# Altium PCB osc_evo.PcbDoc (part 1 of 5)
Units mm, origin at the board's own origin, x right, y up, seen from the top; angles counter-clockwise.
Board outline 145 x 85 mm, 4 copper layers (Top Layer, Mid-Layer 1, Mid-Layer 2, Bottom Layer); 114 components, 170 nets, 648 pads, 625 vias.
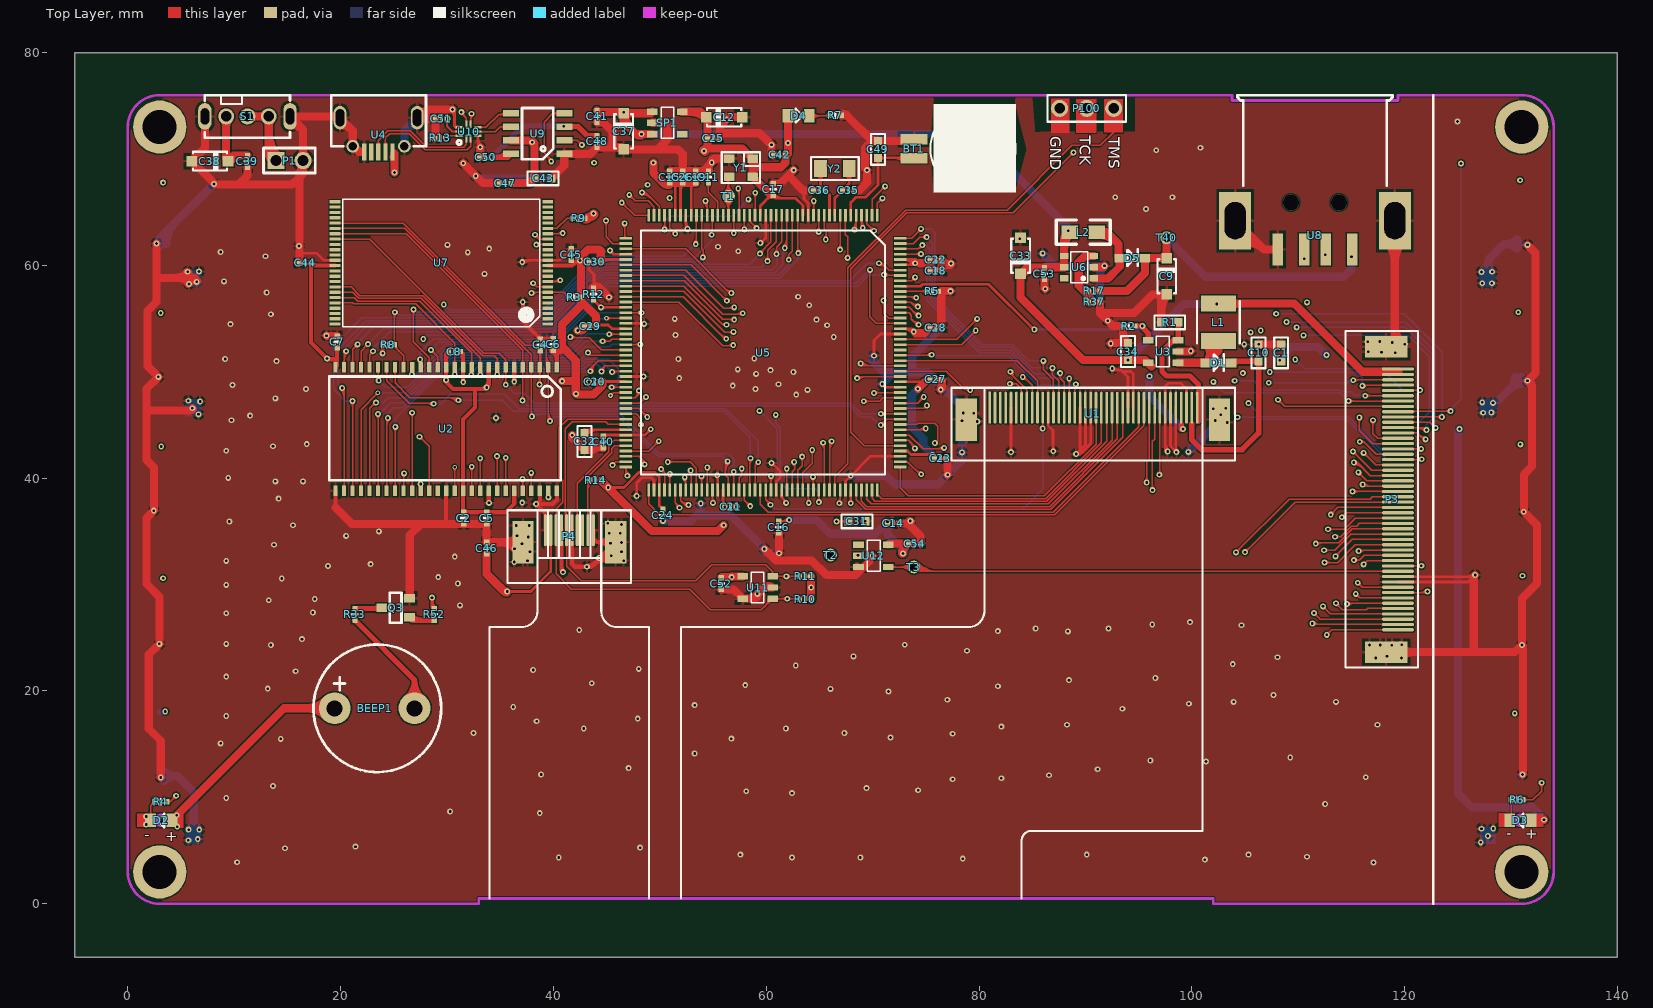
[diagram p0: Top Layer view]
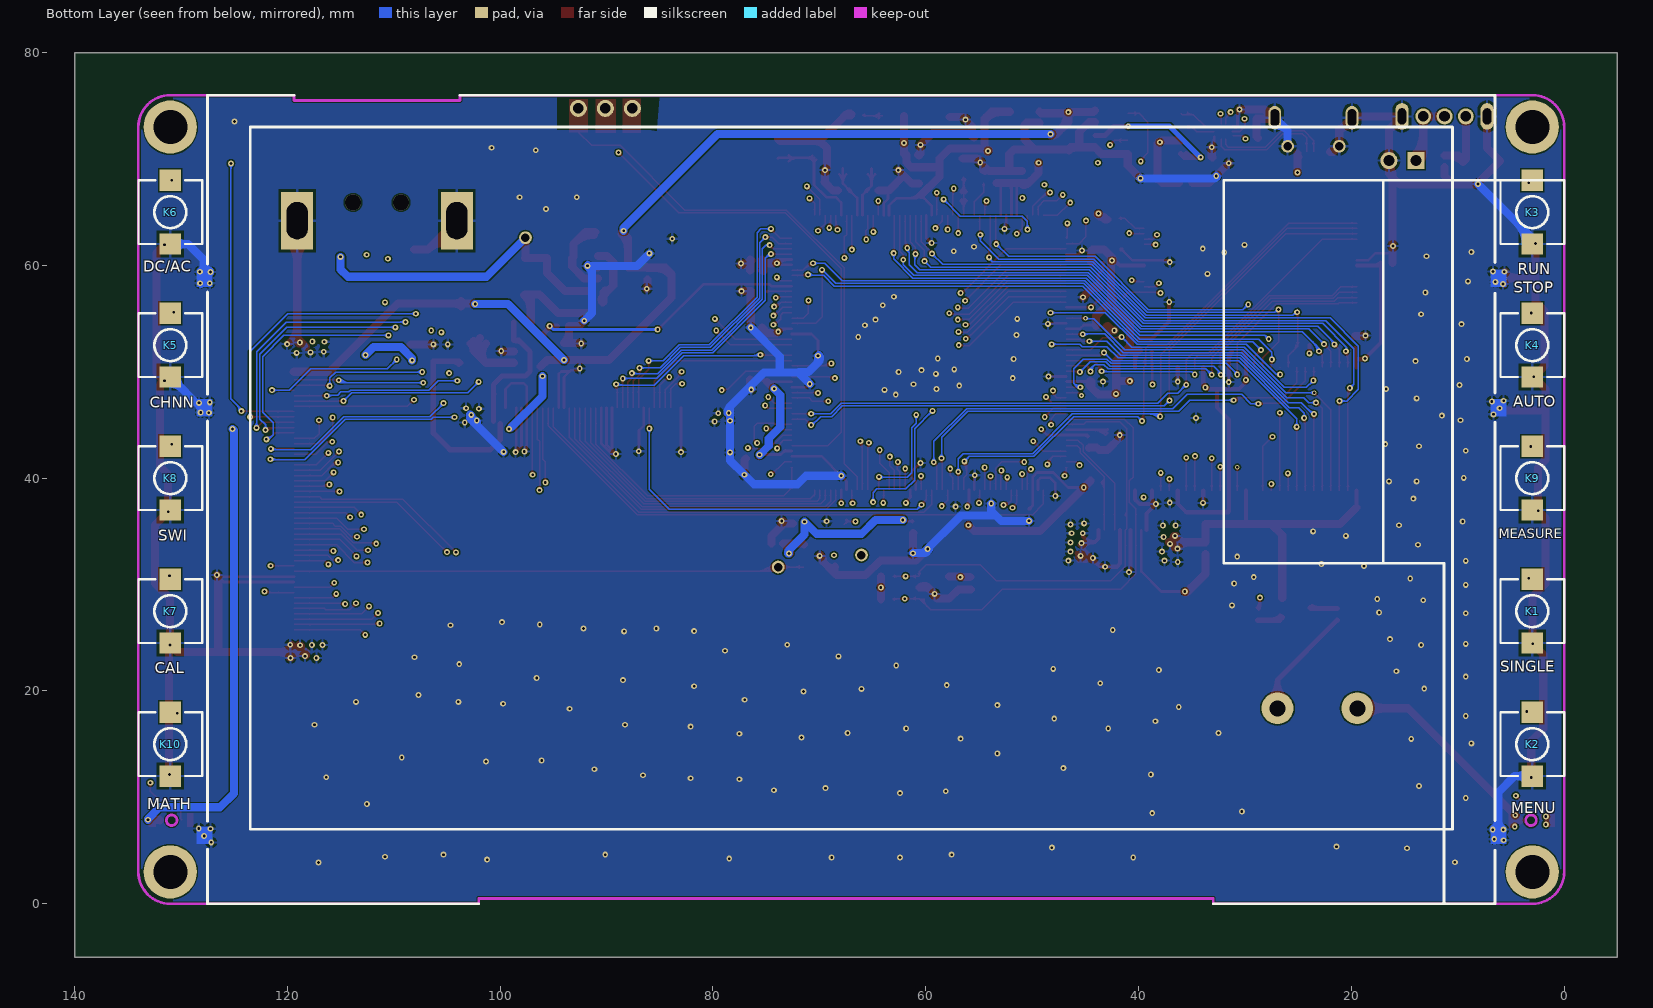
[diagram p1: Bottom Layer view, seen from below]
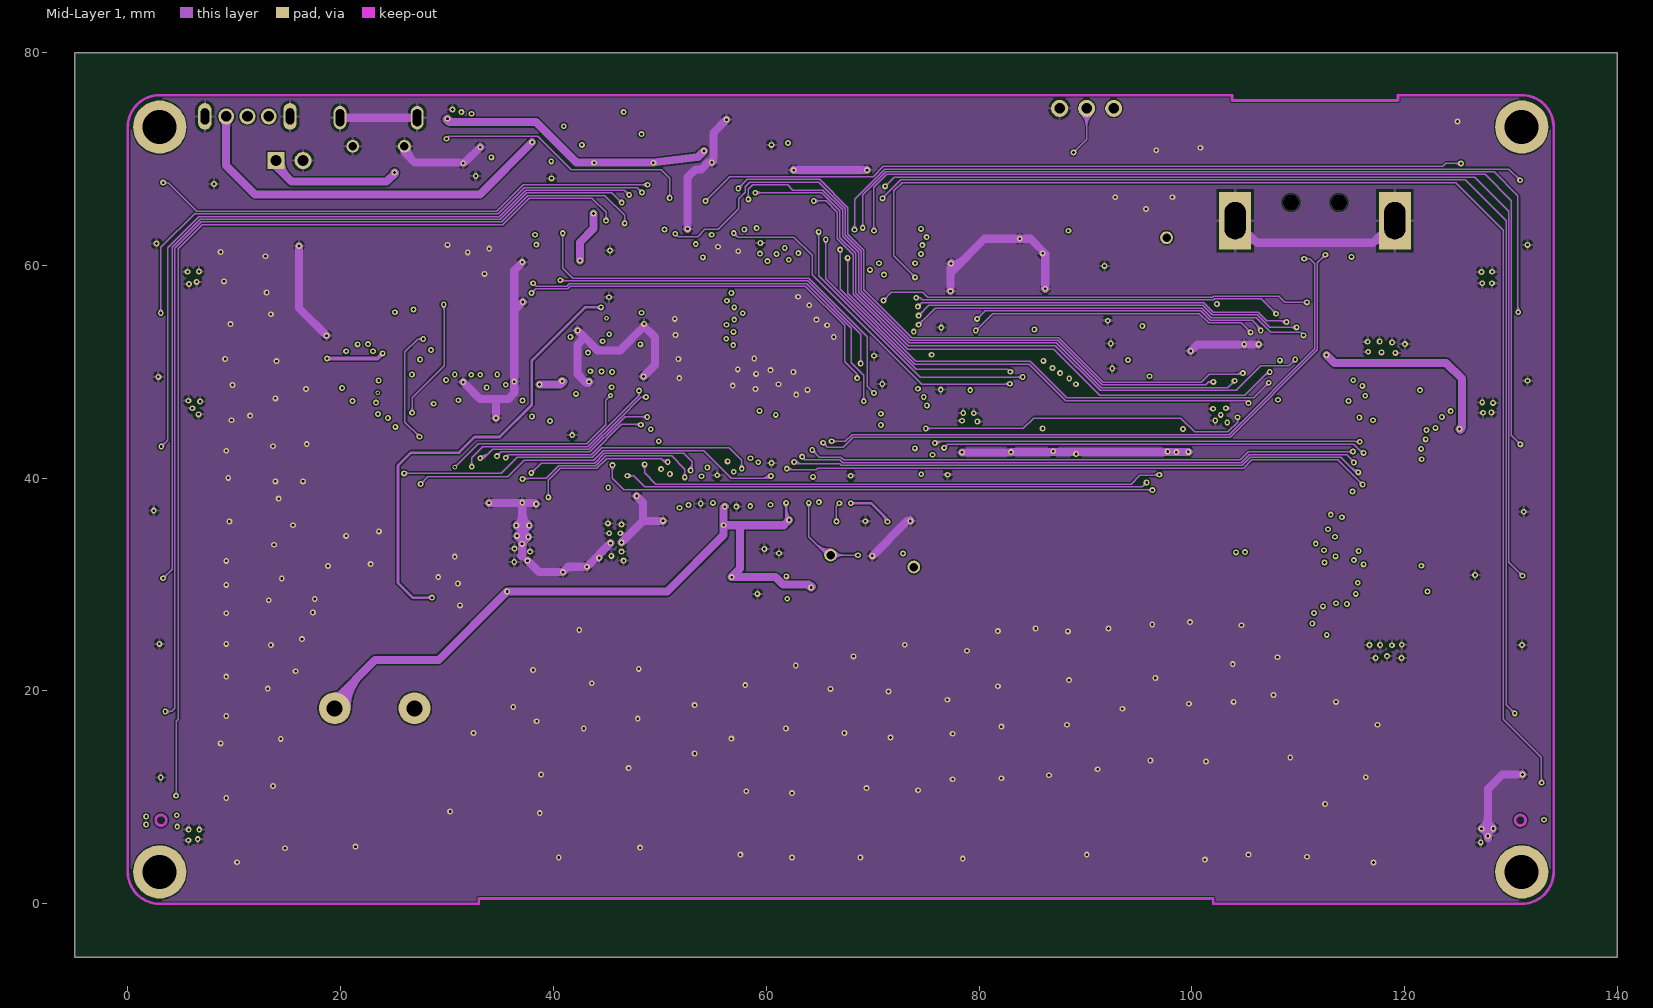
[diagram p2: Mid-Layer 1]
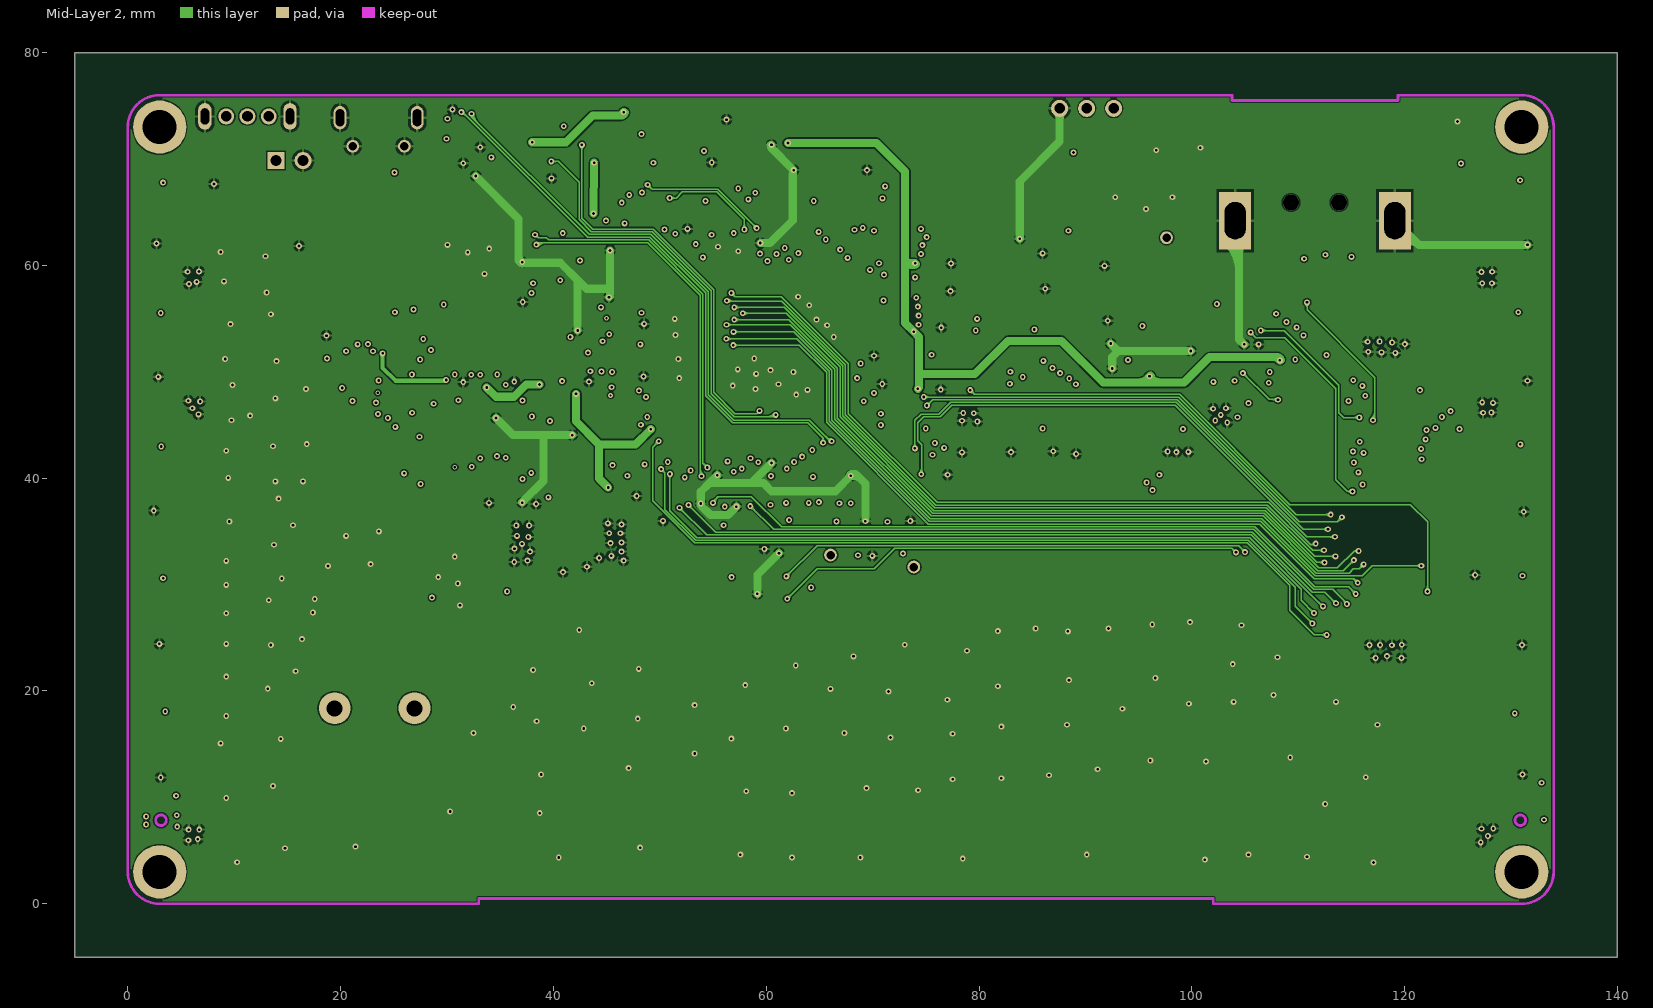
[diagram p3: Mid-Layer 2]

## Layer stack, top to bottom
Top Layer: signal copper 0.0356
Dielectric: core 0.32, FR-4, Dk 4.8
Mid-Layer 1: signal copper 0.0356
Dielectric: prepreg 0.32, FR-4, Dk 4.8
Mid-Layer 2: signal copper 0.0356
Dielectric: core 0.32, FR-4, Dk 4.8
Bottom Layer: signal copper 0.0356

## Board outline
-5,-5 140,-5 140,80 -5,80

## Design rules (kind name [scope] priority, off if disabled: settings)
Clearance [All] p1: gap=0.127
ComponentClearance [All] p1 off: gap=0.254 collisioncheckmode=3 verticalgap=0.254 showdistances=FALSE
Height [All] p1 off: minheight=0 maxheight=25.4 prefheight=12.7
HoleSize [All] p1: absolutevalues=TRUE maxlimit=6.3 minlimit=0.2 maxpercent=80.000 minpercent=20.000
HoleToHoleClearance [All] p1: gap=0.025 allowstackedmicrovias=TRUE
MinimumSolderMaskSliver [All] p1: minsoldermaskwidth=0.025
PolygonConnect [All] p1: connectstyle=Relief reliefconductorwidth=0.254 reliefentries=4 polygonreliefangle="90 Angle" airgapwidth=0.254
RoutingVias [All] p1: holewidth=0.2 width=0.45 viastyle="Through Hole" minholewidth=0.2 minwidth=0.45 maxholewidth=10 maxwidth=10
SilkToSilkClearance [All] p1 off: silktosilkclearance=0.025
SilkToSolderMaskClearance [IsPad] p1 off: minsilkscreentomaskgap=0.025 clearancetoexposedcopper=TRUE
SolderMaskExpansion [All] p1: expansion=0.102
Width [All] p1: maxlimit=5.08 minlimit=0.127 preferedwidth=0.127 minimp=50.000000 maximp=50.000000 favimp=50.000000
21 further rules are at their usual default settings.

## Classes and differential pairs
component class osc_evo: BT1 C1 C2 C4 C5 C6 C7 C8 C10 C11 C12 C14 C15 C16 C17 C18 C19 C20 C21 C22 C23 C24 C25 C26 C27 C28 C29 C30 C31 C32 C34 C35 C36 C37 C38 C39 C40 C41 C42 C49 D1 D2 D3 D4 L1 P1 P100 R1 R2 R4 R5 R6 R7 R8 R12 SP1 T1 U1 U2 U3 U5 Y1 Y2
component class osc_con: BEEP1 C9 C33 C43 C44 C45 C46 C47 C48 C50 C51 C52 C53 C54 D5 K1 K2 K3 K4 K5 K6 K7 K8 K9 K10 L2 P3 P4 Q3 R3 R9 R10 R11 R13 R14 R17 R33 R37 R52 S1 T2 T3 T40 U4 U6 U7 U8 U9 U10 U11 U12

## Components (designator, comment, footprint, x,y, rotation, side; value= is the part's Value field where it differs from the comment)
BEEP1 "BEEP12*9" BEEP 19.45,18.375 r0 top
BT1 "Battery" BAT1 76.1,71.625 r270 top
C1 "C10uF" 0603C 108.4,50.975 r90 top
C2 "C0.1uF" 0402 31.575,36.8 r270 top
C4 "C0.1uF" 0402 38.775,51.975 r90 top
C5 "C0.1uF" 0402 33.725,36.8 r270 top
C6 "C0.1uF" 0402 39.975,52.025 r90 top
C7 "C0.1uF" 0402 19.675,52.25 r90 top
C8 "C0.1uF" 0402 30.15,51.9 r0 top
C9 "47UF" CAP-T-3216 98.45,60.575 r270 top
C10 "C10uF" 0603C 106.275,50.975 r90 top
C11 "C1UF" 0402 54.575,67.75 r90 top
C12 "47uF" CAP-T-3216 54.45,74.725 r0 top
C14 "C0.1uF" 0402 71.4,35.75 r0 top
C15 "C0.1uF" 0402 50.95,67.75 r90 top
C16 "C0.1uF" 0402 61.175,35.95 r270 top
C17 "C0.1uF" 0402 60.65,66.6 r90 top
C18 "C0.1uF" 0402 75.4,59.5 r0 top
C19 "C0.1uF" 0402 53.367,67.75 r90 top
C20 "C0.1uF" 0402 44.45,49.075 r180 top
C21 "C0.1uF" 0402 56.1,37.325 r0 top
C22 "C0.1uF" 0402 75.4,60.525 r0 top
C23 "C0.1uF" 0402 75.825,41.85 r0 top
C24 "C0.1uF" 0402 50.3,37.075 r270 top
C25 "C0.1uF" 0402 54.475,71.925 r0 top
C26 "C0.1uF" 0402 52.158,67.75 r90 top
C27 "C0.1uF" 0402 75.4,49.275 r0 top
C28 "C0.1uF" 0402 75.4,54.15 r0 top
C29 "C0.1uF" 0402 44,54.3 r180 top
C30 "C0.1uF" 0402 44.45,60.325 r180 top
C31 "10uF" 0603C 67.725,35.95 r0 top
C32 "10uF" 0603C 42.925,44.25 r270 top
C33 "47UF" CAP-T-3216 83.1,59.3 r90 top
C34 "C10uF" 0603C 94,51.1 r90 top
C35 "C22pF" 0402 68.275,67.05 r180 top
C36 "C22pF" 0402 64.425,67.05 r0 top
C37 "47uF" CAP-T-3216 47.4,74.198 r270 top
C38 "47uF" CAP-T-3216 9.325,69 r180 top
C39 "C0.1uF" 0402 11.25,70.325 r270 top
C40 "C0.1uF" 0402 44.7,43.95 r270 top
C41 "C0.1uF" 0402 44.1,73.448 r90 top
C42 "C0.1uF" 0402 60.725,70.4 r0 top
C43 "22UF" 0603C 38.225,68.175 r0 top
C44 "C0.1uF" 0402 17.225,60.225 r180 top
C45 "C0.1uF" 0402 41.675,60.45 r90 top
C46 "C0.1uF" 0402 33.725,33.975 r270 top
C47 "104" 0402 36.025,67.725 r180 top
C48 "104" 0402 44.1,72.2 r270 top
C49 "C10uF" 0603C 70.5,70.1 r90 top
C50 "104" 0402 34.175,70.15 r180 top
C51 "C0.1uF" 0402 30.025,73.775 r180 top
C52 "C0.1uF" 0402 55.775,30.65 r270 top
C53 "104" 0402 86.15,59.775 r270 top
C54 "C0.1uF" 0402 73.4,33.85 r0 top
D1 "1N5819WS" SOD23-322F 101.325,50.85 r180 top
D2 "LED-B" LED 4.15,7.85 r180 top
D3 "LED-G" LED 131.875,7.85 r180 top
D4 "LED" LED 62.05,74.05 r0 top
D5 "1N5918WS" SOD23-322F 93.225,60.7 r180 top
K1 "KEY-PB" KEY_6*6*4.3 3,27.5 r180 bottom locked
K2 "KEY-PB" KEY_6*6*4.3 3,15 r180 bottom locked
K3 "KEY-PB" KEY_6*6*4.3 3,65 r180 bottom locked
K4 "KEY-PB" KEY_6*6*4.3 3,52.5 r180 bottom locked
K5 "KEY-PB" KEY_6*6*4.3 131,52.5 r180 bottom locked
K6 "KEY-PB" KEY_6*6*4.3 131,65 r180 bottom locked
K7 "KEY-PB" KEY_6*6*4.3 131,27.5 r180 bottom locked
K8 "KEY-PB" KEY_6*6*4.3 131,40 r180 bottom locked
K9 "KEY-PB" KEY_6*6*4.3 3,40 r180 bottom locked
K10 "KEY-PB" KEY_6*6*4.3 131,15 r180 bottom locked
L1 "Inductor-22uH" ins-443 100.5,52.65 r0 top
L2 "10uH" 0805 88.525,63.125 r0 top
P1 "Head2" HEAD2 16.475,69.85 r90 top
P3 "FPC50-0.5" FPC50-0.5 121,38 r180 top locked
P4 "TOUCH-PFC10" FPC10-0.5 41.5,34.55 r270 top
P100 "head*3" "head*3 - duplicate" 87.575,74.75 r90 top
Q3 "SI2302" SOT-23-3 26.475,26.925 r90 top
R1 "R8.2" 0603R 98.725,54.65 r180 top
R2 "R10K" 0402 93.525,54.3 r0 top
R3 "R10K" 0402 42.525,57.025 r180 top
R4 "R2K" 0402 2.55,9.6 r0 top
R5 "R10K" 0402 75.075,57.55 r0 top
R6 "R2K" 0402 130.025,9.775 r0 top
R7 "R2K" 0402 65.95,74.1 r0 top
R8 "R10K" 0402 25.05,52.525 r180 top
R9 "R10K" 0402 41.85,64.425 r0 top
R10 "R2K" 0402 63.125,28.625 r0 top
R11 "R2K" 0402 63.1,30.775 r0 top
R12 "R2K" 0402 43.775,57.85 r270 top
R13 "R10K" 0402 28.8,71.975 r0 top
R14 "R10K" 0402 44.525,39.8 r180 top
R17 "R84.5K" 0402 90.275,57.6 r0 top
R33 "R100R" 0402 21.35,27.75 r270 top
R37 "10K" 0402 91.375,56.575 r180 top
R52 "R100R" 0402 28.8,27.75 r270 top
S1 "SW" SW-3 7.25,74 r90 top
SP1 "SP6201-3-3" SOT23-5 49.3,74.436 r270 top
T1 "TP" TEST_POINT#1 56.45,66.5 r0 top
T2 "TP" TEST_POINT#2 66.05,32.775 r0 top
T3 "TP" TEST_POINT#2 73.875,31.65 r0 top
T40 "TP" TEST_POINT#2 97.625,62.6 r90 top
U1 "AT043TN24" FPC40-N 100.5,46.625 r270 top
U2 "W9825G6KH-6" TSOP54 40.325,50.425 r270 top locked
U3 "CAT4139" SOT23-5 98.7,50.85 r90 top
U4 "MINI USB" Micro_USB_t 26,71.2 r90 top
U5 "STM32F407IGT6" LQFP176 70.45,64.7 r270 top locked
U6 "SY7152ABC" SOT23-6 90.8,58.775 r90 top
U7 "MT29F4G08" TSOP48 39.475,54.475 r180 top locked
U8 "USB-A" USB-A-SMA 108.075,61.5 r270 top
U9 "HT42B534" SOP-8 41.025,70.475 r180 top (schematic designator U8)
U10 "BCT4227ETB" WQFN10 32.025,72.575 r90 top
U11 "K24C02" SOT23-5 60.6,28.675 r90 top
U12 "74LVC1G17" SOT23-5 68.675,33.75 r270 top
Y1 "XTAL-25Mhz" XTAL3225 59.125,70.325 r180 top
Y2 "Y32.768K-3216" CRY3215-2P 65.1,69.1 r0 top

## Footprints (in the part's own frame and the unit in brackets; to place one, negate y for a bottom-side part, rotate by r counter-clockwise, add the part's x,y. Pads: shape width x height; smd on the part's side, far side on the other; paste and mask are expansions set on the pad)
0402 [mm]
  rect 0.5x0.5 smd: 1(0,0) 2(1.1,0)
  silkscreen extent 0.55,-0.23 0.55,0.23
0603C [mil]
  rect 30x30 smd: 1(0,0) 2(62.99,0)
  silkscreen extent -26,-26 89,26
0603R [mil]
  rect 30x30 smd: 1(0,0) 2(62.99,0)
  silkscreen extent -26,-26 89,26
0805 [mil]
  rect 60x50 smd: 1(0,0) 2(100,0)
  silkscreen extent -50,-45 150,45
BAT1 [mm]
  rect 1x2.5 smd: 1(1.566,-2.211) 2(-0.234,-2.211)
  silkscreen extent -3.33,-0.66 4.67,7.34
BEEP [mm]
  round 3 hole 1.5: 1(0,0) 2(7.5,0)
  silkscreen extent -2,-6 10,6
CAP-T-3216 [mm]
  rect 1x1 smd: 1(-0.1,-0.8) 2(3.3,-0.8)
  silkscreen extent 0,-1.68 3.2,0.08
CRY3215-2P [mm]
  rect 1.2x1.6 smd: 1(0,0) 2(2.7,0)
  silkscreen extent -0.9,-1.07 3.6,1.1
FPC10-0.5 [mm]
  rect 4x2 smd: 0(0.56,4.35) 0(0.56,-4.35)
  oval 3x0.3 smd: 1(-0.56,-2.25) 2(-0.56,-1.75) 3(-0.56,-1.25) 4(-0.56,-0.75) 5(-0.56,-0.25) 6(-0.56,0.25) 7(-0.56,0.75) 8(-0.56,1.25) 9(-0.56,1.75) 10(-0.56,2.25)
  silkscreen extent -2.43,-5.8 4.39,5.8
FPC40-N [mm]
  rect 4x2 smd: 0(1.12,2.104) 0(1.12,-21.695)
  oval 3x0.25 smd: 1(0,0) 2(0,-0.5) 3(0,-1) 4(0,-1.5) 5(0,-2) 6(0,-2.5) 7(0,-3) 8(0,-3.5) 9(0,-4) 10(0,-4.5) 11(0,-5) 12(0,-5.5) 13(0,-6) 14(0,-6.5) 15(0,-7) 16(0,-7.5) 17(0,-8) 18(0,-8.5) 19(0,-9) 20(0,-9.5) 21(0,-10) 22(0,-10.5) 23(0,-11) 24(0,-11.5) 25(0,-12) 26(0,-12.5) 27(0,-13) 28(0,-13.5) 29(0,-14) 30(0,-14.5) 31(0,-15) 32(0,-15.5) 33(0,-16) 34(0,-16.5) 35(0,-17) 36(0,-17.5) 37(0,-18) 38(0,-18.5) 39(0,-19)
  rect 3x0.25 smd: 40(0,-19.5)
  silkscreen extent -1.88,-23.08 4.97,3.55
FPC50-0.5 [mm]
  rect 4x2 smd: 0(2.745,14.35) 0(2.745,-14.35)
  oval 3x0.3 smd: 1(1.625,12.25) 2(1.625,11.75) 3(1.625,11.25) 4(1.625,10.75) 5(1.625,10.25) 6(1.625,9.75) 7(1.625,9.25) 8(1.625,8.75) 9(1.625,8.25) 10(1.625,7.75) 11(1.625,7.25) 12(1.625,6.75) 13(1.625,6.25) 14(1.625,5.75) 15(1.625,5.25) 16(1.625,4.75) 17(1.625,4.25) 18(1.625,3.75) 19(1.625,3.25) 20(1.625,2.75) 21(1.625,2.25) 22(1.625,1.75) 23(1.625,1.25) 24(1.625,0.75) 25(1.625,0.25) 26(1.625,-0.25) 27(1.625,-0.75) 28(1.625,-1.25) 29(1.625,-1.75) 30(1.625,-2.25) 31(1.625,-2.75) 32(1.625,-3.25) 33(1.625,-3.75) 34(1.625,-4.25) 35(1.625,-4.75) 36(1.625,-5.25) 37(1.625,-5.75) 38(1.625,-6.25) 39(1.625,-6.75) 40(1.625,-7.25) 41(1.625,-7.75) 42(1.625,-8.25) 43(1.625,-8.75) 44(1.625,-9.25) 45(1.625,-9.75) 46(1.625,-10.25) 47(1.625,-10.75) 48(1.625,-11.25) 49(1.625,-11.75) 50(1.625,-12.25)
  silkscreen extent -0.25,-15.83 6.58,15.8
HEAD2 [mm]
  rect 1.6x1.6 hole 1: 1(0,2.54)
  round 1.6 hole 1: 2(0,0)
  silkscreen extent -1.17,-1.15 1.17,3.72
"head*3 - duplicate" [mm]
  round 1.6 hole 1: 1(0,0) 2(0,-2.54) 3(0,-5.08)
  silkscreen extent -1.25,-6.22 1.25,1.12
ins-443 [mm]
  rect 3.3x1.5 smd: 1(2,3.75) 2(2,0.25)
  silkscreen extent 0,0 4,4
KEY_6*6*4.3 [mm]
  rect 2x2 smd: 1(0,-3) 2(0,3)
  silkscreen extent -3,-3 3,3
LED [mil]
  rect 40x50 smd: 1(0,0) 2(78.74,0)
  silkscreen extent 29,-25 49,27
LQFP176 [mm]
  rect 1.2x0.25 smd: 1(0,0) 2(0,-0.5) 3(0,-1) 4(0,-1.5) 5(0,-2) 6(0,-2.5) 7(0,-3) 8(0,-3.5) 9(0,-4) 10(0,-4.5) 11(0,-5) 12(0,-5.5) 13(0,-6) 14(0,-6.5) 15(0,-7) 16(0,-7.5) 17(0,-8) 18(0,-8.5) 19(0,-9) 20(0,-9.5) 21(0,-10) 22(0,-10.5) 23(0,-11) 24(0,-11.5) 25(0,-12) 26(0,-12.5) 27(0,-13) 28(0,-13.5) 29(0,-14) 30(0,-14.5) 31(0,-15) 32(0,-15.5) 33(0,-16) 34(0,-16.5) 35(0,-17) 36(0,-17.5) 37(0,-18) 38(0,-18.5) 39(0,-19) 40(0,-19.5) 41(0,-20) 42(0,-20.5) 43(0,-21) 44(0,-21.5) 89(25.8,-21.5) 90(25.8,-21) 91(25.8,-20.5) 92(25.8,-20) 93(25.8,-19.5) 94(25.8,-19) 95(25.8,-18.5) 96(25.8,-18) 97(25.8,-17.5) 98(25.8,-17) 99(25.8,-16.5) 100(25.8,-16) 101(25.8,-15.5) 102(25.8,-15) 103(25.8,-14.5) 104(25.8,-14) 105(25.8,-13.5) 106(25.8,-13) 107(25.8,-12.5) 108(25.8,-12) 109(25.8,-11.5) 110(25.8,-11) 111(25.8,-10.5) 112(25.8,-10) 113(25.8,-9.5) 114(25.8,-9) 115(25.8,-8.5) 116(25.8,-8) 117(25.8,-7.5) 118(25.8,-7) 119(25.8,-6.5) 120(25.8,-6) 121(25.8,-5.5) 122(25.8,-5) 123(25.8,-4.5) 124(25.8,-4) 125(25.8,-3.5) 126(25.8,-3) 127(25.8,-2.5) 128(25.8,-2) 129(25.8,-1.5) 130(25.8,-1) 131(25.8,-0.5) 132(25.8,0)
  rect 0.25x1.2 smd: 45(2.15,-23.65) 46(2.65,-23.65) 47(3.15,-23.65) 48(3.65,-23.65) 49(4.15,-23.65) 50(4.65,-23.65) 51(5.15,-23.65) 52(5.65,-23.65) 53(6.15,-23.65) 54(6.65,-23.65) 55(7.15,-23.65) 56(7.65,-23.65) 57(8.15,-23.65) 58(8.65,-23.65) 59(9.15,-23.65) 60(9.65,-23.65) 61(10.15,-23.65) 62(10.65,-23.65) 63(11.15,-23.65) 64(11.65,-23.65) 65(12.15,-23.65) 66(12.65,-23.65) 67(13.15,-23.65) 68(13.65,-23.65) 69(14.15,-23.65) 70(14.65,-23.65) 71(15.15,-23.65) 72(15.65,-23.65) 73(16.15,-23.65) 74(16.65,-23.65) 75(17.15,-23.65) 76(17.65,-23.65) 77(18.15,-23.65) 78(18.65,-23.65) 79(19.15,-23.65) 80(19.65,-23.65) 81(20.15,-23.65) 82(20.65,-23.65) 83(21.15,-23.65) 84(21.65,-23.65) 85(22.15,-23.65) 86(22.65,-23.65) 87(23.15,-23.65) 88(23.65,-23.65) 133(23.65,2.15) 134(23.15,2.15) 135(22.65,2.15) 136(22.15,2.15) 137(21.65,2.15) 138(21.15,2.15) 139(20.65,2.15) 140(20.15,2.15) 141(19.65,2.15) 142(19.15,2.15) 143(18.65,2.15) 144(18.15,2.15) 145(17.65,2.15) 146(17.15,2.15) 147(16.65,2.15) 148(16.15,2.15) 149(15.65,2.15) 150(15.15,2.15) 151(14.65,2.15) 152(14.15,2.15) 153(13.65,2.15) 154(13.15,2.15) 155(12.65,2.15) 156(12.15,2.15) 157(11.65,2.15) 158(11.15,2.15) 159(10.65,2.15) 160(10.15,2.15) 161(9.65,2.15) 162(9.15,2.15) 163(8.65,2.15) 164(8.15,2.15) 165(7.65,2.15) 166(7.15,2.15) 167(6.65,2.15) 168(6.15,2.15) 169(5.65,2.15) 170(5.15,2.15) 171(4.65,2.15) 172(4.15,2.15) 173(3.65,2.15) 174(3.15,2.15) 175(2.65,2.15) 176(2.15,2.15)
  silkscreen extent 1.43,-22.21 24.36,0.71
Micro_USB_t [mm]
  round 1.2 hole 0.8: 0(-0.005,4.85) 0(-0.005,0)
  oval 2.2x1.2 hole 0.8 slot 1.6 at 0 deg: 0(2.675,6.05) 0(2.675,-1.2)
  rect 1.6x0.4 smd: 1(-0.525,1.125) 2(-0.525,1.787) 3(-0.525,2.45) 4(-0.525,3.112) 5(-0.525,3.775)
  silkscreen extent 0,-2.02 4.8,6.88
SOD23-322F [mm]
  rect 1x0.83 smd: 1(0,0.025) 2(-2.36,0.025)
  silkscreen extent -1.68,-0.8 -0.73,0.72, body extent -2.58,-0.67 0.22,0.68, height 0.75
SOP-8 [mm]
  rect 1.5x0.6 smd: 1(0,0) 2(0,-1.27) 3(0,-2.54) 4(0,-3.81) 5(5,-3.81) 6(5,-2.54) 7(5,-1.27) 8(5,0)
  silkscreen extent 1.05,-4.32 3.98,0.51
SOT23-5 [mm]
  rect 0.6x1 smd: 1(0,0) 2(1.05,0) 3(2.1,0) 4(2.1,2.8) 5(0,2.8)
  silkscreen extent -0.4,0.82 2.5,2.02
SOT23-6 [mm]
  rect 0.6x0.8 smd: 1(0,0) 2(1.05,0) 3(2.1,0) 4(2.1,2.8) 5(1.05,2.8) 6(0,2.8)
  silkscreen extent -0.4,0.6 2.5,2.2
SOT-23-3 [mm]
  rect 0.8x1 smd: 1(0,0) 2(1.8,0) 3(0.9,2.6)
  silkscreen extent -0.5,0.75 2.3,1.85
SW-3 [mm]
  oval 2.5x1.25 hole 0.8 slot 1.5 at 0 deg: 1(0,0) 5(0,-8)
  round 1.5 hole 1: 2(0,-2) 3(0,-4) 4(0,-6)
  silkscreen extent -2,-8 2,0
TEST_POINT#1 [mm]
  round 1.2 smd: 1(0,0)
TEST_POINT#2 [mm]
  round 1.2 hole 0.8: 1(0,0)
TSOP48 [mm]
  rect 1x0.3 smd: 1(0,0) 2(0,-0.5) 3(0,-1) 4(0,-1.5) 5(0,-2) 6(0,-2.5) 7(0,-3) 8(0,-3.5) 9(0,-4) 10(0,-4.5) 11(0,-5) 12(0,-5.5) 13(0,-6) 14(0,-6.5) 15(0,-7) 16(0,-7.5) 17(0,-8) 18(0,-8.5) 19(0,-9) 20(0,-9.5) 21(0,-10) 22(0,-10.5) 23(0,-11) 24(0,-11.5) 25(20,-11.5) 26(20,-11) 27(20,-10.5) 28(20,-10) 29(20,-9.5) 30(20,-9) 31(20,-8.5) 32(20,-8) 33(20,-7.5) 34(20,-7) 35(20,-6.5) 36(20,-6) 37(20,-5.5) 38(20,-5) 39(20,-4.5) 40(20,-4) 41(20,-3.5) 42(20,-3) 43(20,-2.5) 44(20,-2) 45(20,-1.5) 46(20,-1) 47(20,-0.5) 48(20,0)
  silkscreen extent 0.75,-11.75 19.25,0.25
TSOP54 [mm]
  rect 1x0.4 smd: 1(0,0) 2(0,-0.8) 3(0,-1.6) 4(0,-2.4) 5(0,-3.2) 6(0,-4) 7(0,-4.8) 8(0,-5.6) 9(0,-6.4) 10(0,-7.2) 11(0,-8) 12(0,-8.8) 13(0,-9.6) 14(0,-10.4) 15(0,-11.2) 16(0,-12) 17(0,-12.8) 18(0,-13.6) 19(0,-14.4) 20(0,-15.2) 21(0,-16) 22(0,-16.8) 23(0,-17.6) 24(0,-18.4) 25(0,-19.2) 26(0,-20) 27(0,-20.8) 28(11.6,-20.8) 29(11.6,-20) 30(11.6,-19.2) 31(11.6,-18.4) 32(11.6,-17.6) 33(11.6,-16.8) 34(11.6,-16) 35(11.6,-15.2) 36(11.6,-14.4) 37(11.6,-13.6) 38(11.6,-12.8) 39(11.6,-12) 40(11.6,-11.2) 41(11.6,-10.4) 42(11.6,-9.6) 43(11.6,-8.8) 44(11.6,-8) 45(11.6,-7.2) 46(11.6,-6.4) 47(11.6,-5.6) 48(11.6,-4.8) 49(11.6,-4) 50(11.6,-3.2) 51(11.6,-2.4) 52(11.6,-1.6) 53(11.6,-0.8) 54(11.6,0)
  silkscreen extent 0.87,-21.37 10.63,0.38
USB-A-SMA [mm]
  rect 5.4x3 hole 2 slot 3.5 at 0 deg: 0(-2.7,11) 0(-2.7,-4)
  rect 3x1 smd: 1(0,7) 2(0,4.5) 3(0,2.5) 4(0,0)
  silkscreen extent -14.5,-3.8 -6,10.8
WQFN10 [mm]
  rect 0.7x0.2 smd: 1(-0.675,0.2) 2(-0.675,-0.2) 6(0.675,-0.2) 7(0.675,0.2)
  rect 0.2x0.7 smd: 3(-0.4,-0.875) 4(0,-0.875) 5(0.4,-0.875) 8(0.4,0.875) 9(0,0.875) 10(-0.4,0.875)
  silkscreen extent -1.22,0.68 -0.82,1.07
XTAL3225 [mm]
  rect 1x0.8 smd: 1(0.4,0.3) 2(2.6,0.3) 3(2.6,2) 4(0.4,2)
  silkscreen extent -0.3,-0.3 3.3,2.6

## Part data
BEEP1: library part Bell, "Electrical Bell"
BT1: "Multicell Battery"
C1: library part C10uF-B
C9 C12 C33 C37 C38: library part C10uF, "贴片电容"
C10 C34: library part "Cap Pol1", "Polarized Capacitor (Radial)"
C11 C47 C48 C50 C53: library part C0.1uF
C31 C32: library part ELECTRO1, "Electrolytic Capacitor"
C43: library part C100uF
D1 D5: library part Diode
D2 D3: library part LED
L1 L2: library part Inductor-100uH
P3: library part "Header 25X2", "Header, 25-Pin, Dual row"
P4: library part "Header 10", "Header, 10-Pin"
Q3: library part MOSFET-N
R3 R9 R13 R14: library part R2K
R17 R37: library part R1M
S1: library part HEAD5
SP1: library part SP6201
Y1: library part XTAL-100Mhz
Y2: library part Y32.768K

## Free pads (board coordinates)
  round 5 hole 3.2: 0(3,3) 0(3,73) 0(131,3) 0(131,73)

## Via types
v1: diameter 0.55, hole 0.25, Top Layer to Bottom Layer, tented both sides, 463 vias
v2: diameter 0.55, hole 0.25, Top Layer to Bottom Layer, 156 vias
v3: diameter 0.45, hole 0.2, Top Layer to Bottom Layer, tented both sides, 4 vias
v4: diameter 1.5, hole 1.5, Top Layer to Bottom Layer, tented both sides, 2 vias

## Nets (pads, with @x,y where several pads share a name; then routed paths per layer and width w, separated by ;. In a path a pad name is that pad's centre, name@x,y a point inside that pad or via, vN(x,y) a via of type N, cw(c..) or ccw(c..) an arc to the next point about the centre after c; other vN are vias at no path point)
3V3: BEEP1.1 C1.1 C2.1 C4.1 C5.1 C6.1 C7.1 C8.1 C12.1 C14.1 C15.1 C16.1 C17.1 C18.1 C19.1 C20.1 C21.1 C22.1 C23.1 C24.1 C25.1 C26.1 C27.1 C28.1 C29.1 C30.1 C40.1 C42.2 C44.1 C45.1 C46.2 C51.1 C52.1 C54.1 D2.1 D3.1 D4.1 P4.2 R3.1 R8.2 R9.2 R10.2 R11.2 R14.1 SP1.5 U1.4 U2.1 U2.3 U2.9 U2.14 U2.27 U2.43 U2.49 U5.15 U5.23 U5.36 U5.38 U5.39 U5.49 U5.62 U5.72 U5.82 U5.91 U5.103 U5.114 U5.127 U5.136 U5.149 U5.159 U5.171 U5.172 U7.12 U7.37 U10.9 U11.4 U12.5 Y1.1 Y1.4 | length 603.2
  Top Layer w0.203: C51.1@29.92,73.67 cw(c29.727,73.477) 30,73.477 ccw(c29.752,73.477) C51.1@29.927,73.652 ; 30,73.236 cw(c30.589,73.236) C51.1@30.173,73.652 ; 30,73.356 cw(c30.444,73.356) C51.1@30.13,73.67 ; C51.1@30.025,73.775 30,73.75 30,73.075 30.5,72.575 U10.9@31.15,72.575
  Top Layer w0.254: 33.725,31.425 35.8,29.35 37.875,29.35 39.75,31.225 P4.2@39.75,35.11 ; 35.291,29.859 cw(c34.783,29.35) v1@35.502,29.35 ; v1@35.755,29.245 cw(c36.007,28.993) 36.007,29.35 cw(c36.007,29.707) v1@35.755,29.455 ; v1@38.595,48.905 ccw(c38.282,49.218) 38.725,49.218 ; U2.3@38.673,50.777 ccw(c38.428,51.022) 38.775,51.022 ; C4.1@38.688,51.888 cw(c38.478,51.678) 38.775,51.678 cw(c39.072,51.678) C4.1@38.862,51.888 ; v1(38.7,48.8) 38.725,48.825 U2.3@38.725,50.425 38.775,50.475 C4.1@38.775,51.975 ; 38.725,49.097 ccw(c38.997,49.097) v1@38.805,48.905 ; C29.1@44,54.3 44.1,54.4 45.15,54.4 45.5,54.05 U5.62@46.8,54.05 ; C29.1@44.087,54.213 cw(c44.538,53.762) 44.538,54.4 ; C30.1@44.357,60.418 cw(c44.677,60.098) C30.1@44.677,60.55 ; C20.1@44.45,49.075 44.454,49.079 U5.72@46.771,49.079 ; C30.1@44.45,60.325 44.675,60.55 U5.49@46.8,60.55 ; C20.1@44.537,48.988 cw(c44.757,48.768) 44.757,49.079 ; C20.1@44.537,49.162 ccw(c44.737,49.362) 44.737,49.079 ; C30.1@44.537,60.238 cw(c45.29,59.485) 45.29,60.55 ; C40.1@44.7,43.95 44.8,44.05 U5.82@46.8,44.05 48.6,44.05 v1(49.15,44.6) ; C40.1@44.787,43.863 cw(c45.238,43.412) 45.238,44.05 ; v1(45.15,39.125) 46.625,39.125 48.025,40.525 49.55,40.525 49.95,40.125 U5.91@49.95,38.9 49.95,37.425 C24.1@50.3,37.075 ; v1@45.255,39.02 cw(c45.507,38.768) 45.507,39.125 cw(c45.507,39.482) v1@45.255,39.23 ; v1@49.002,44.6 cw(c48.645,44.6) 48.897,44.347 cw(c49.15,44.095) v1@49.15,44.452 ; C24.1@50.177,37.075 ccw(c49.88,37.075) 50.09,37.285 ccw(c50.3,37.495) C24.1@50.3,37.198 ; U5.39@51.45,64.7 51.454,64.704 51.454,67.746 51.45,67.75 ; U5.38@51.95,64.7 51.95,67.542 C26.1@52.158,67.75 ; 51.95,66.95 cw(c52.958,66.95) C26.1@52.245,67.663 ; C26.1@51.95,67.563 cw(c52.345,67.563) C26.1@52.066,67.843 ; U5.36@52.95,64.7 52.95,67.333 C19.1@53.367,67.75 ; C19.1@53.244,67.75 cw(c52.947,67.75) 53.157,67.54 cw(c53.367,67.33) C19.1@53.367,67.627 ; 55.95,37.984 ccw(c56.759,37.984) C21.1@56.187,37.412 ; 55.95,38.044 ccw(c56.819,38.044) C21.1@56.205,37.43 ; U5.103@55.95,38.9 55.95,37.475 v1(56.1,37.325) C21.1@56.15,37.275 ; C21.1@55.986,37.42 ccw(c55.788,37.586) 56.012,37.715 ; U5.23@59.45,64.7 59.45,65.6 C17.1@60.45,66.6 ; 60.099,66.249 cw(c60.65,65.697) 60.65,66.477 cw(c60.65,66.18) 60.86,66.39 cw(c61.07,66.6) C17.1@60.773,66.6 ; C17.1@60.557,66.507 ccw(c61.058,67.008) 61.058,66.3 ; C17.1@60.65,66.6 60.95,66.3 62.775,66.3 63.45,65.625 U5.15@63.45,64.7 ; C17.1@60.737,66.687 ccw(c61.671,67.621) 61.671,66.3 ; C16.1@61.175,35.95 62.026,35.95 v1(62.153,36.077) ; C16.1@61.262,35.863 cw(c61.472,35.653) 61.472,35.95 cw(c61.472,36.247) C16.1@61.262,36.037 ; U5.114@61.448,38.425 ccw(c61.987,38.425) 61.606,38.044 ; U5.114@61.449,38.426 ccw(c61.564,38.314) 61.45,38.2 ; U5.114@61.45,38.9 61.45,38.2 ; 61.49,35.95 ccw(c61.49,36.74) v1@62.048,36.181 ; 61.552,38.098 cw(c61.128,37.675) v1@61.727,37.675 ; v1(61.875,37.675) 61.975,37.675 61.45,38.2 ; v1@67.845,37.755 ccw(c67.593,38.007) 67.95,38.007 ccw(c68.307,38.007) v1@68.055,37.755 ; v1(67.95,37.65) U5.127@67.95,38.9 ; U5.136@72.6,42.55 73.3,42.55 ; U5.149@72.6,49.05 74.9,49.05 ; U5.159@72.6,54.05 73.593,54.05 v1(73.871,53.771) ; U5.171@72.6,60.05 v1@74,60.05 ; U5.172@72.6,60.55 74.075,60.55 74.212,60.413 ; U5.172@72.798,60.55 cw(c72.798,58.998) v1@73.895,60.095 ; U5.159@72.841,54.05 cw(c72.841,52.741) v1@73.767,53.667 ; U5.136@73.074,42.551 cw(c73.186,42.436) 73.3,42.55 ; U5.136@73.075,42.552 cw(c73.075,42.014) 73.456,42.394 ; 73.281,60.05 ccw(c73.281,60.919) v1@73.895,60.305 ; 73.411,60.55 cw(c73.411,59.611) v1@74.075,60.275 ; 73.454,54.05 cw(c73.454,53.354) v1@73.946,53.846 ; v1@73.723,53.771 ccw(c73.366,53.771) 73.619,54.024 ccw(c73.871,54.277) v1@73.871,53.919 ; 75.125,49.275 74.9,49.05 ; 75.207,42.225 cw(c75.207,41.782) v1@75.52,42.095 ; 75.328,42.225 ccw(c75.328,42.497) v1@75.52,42.305 ; C27.1@75.361,49.158 ccw(c75.218,48.732) 74.9,49.05 ; C23.1@75.65,42.025 75.45,42.225 73.625,42.225 73.3,42.55 ; C23.1@75.702,41.85 ccw(c75.405,41.85) 75.615,42.06 ccw(c75.825,42.27) C23.1@75.825,41.973
  Top Layer w0.381: C44.1@17.267,60.267 ccw(c17.972,60.972) 17.972,59.975 ; v1@18.785,51.31 ccw(c19.11,51.635) 19.11,51.175 ; U7.37@19.475,59.975 17.475,59.975 C44.1@17.225,60.225 17.225,52.75 v1(18.725,51.25) 18.8,51.175 19.675,51.175 ; U2.27@19.518,50.732 ccw(c19.14,51.11) 19.675,51.11 ; U2.27@19.525,50.425 19.675,50.575 19.675,51.175 ; C7.1@19.675,52.25 19.675,51.175 ; v1(23.95,51.725) R8.2@23.95,52.525 ; 29.925,51.213 cw(c30.837,51.213) C8.1@30.192,51.858 ; v1@30.01,49.225 ccw(c30.696,49.225) 30.211,48.739 ; C8.1@30.15,51.9 29.925,51.675 U2.14@29.925,50.425 v1(29.925,49.225) 29.825,49.125 30.575,48.375 32.65,48.375 ; 31.525,37.064 ccw(c31.839,37.064) C2.1@31.617,36.842 ; 33.159,48.375 ccw(c33.159,49.091) 33.665,48.585 ccw(c33.038,49.212) 33.925,49.212 ; v1@33.809,48.525 cw(c34.134,48.525) 33.905,48.755 ; U2.9@33.925,50.425 33.925,48.775 33.525,48.375 32.65,48.375 ; U2.49@36.325,38.825 36.325,37.6 35.525,36.8 C5.1@33.725,36.8 C2.1@31.575,36.8 31.525,36.85 U2.43@31.525,38.825 31.525,45.525 32.65,46.65 32.65,48.375 ; U7.12@39.475,59.975 41.75,59.975 v1@42.225,60.45 ; C6.1@39.933,51.983 cw(c38.986,51.036) 40.325,51.036 ; C6.1@39.964,51.967 cw(c39.881,51.53) 40.325,51.53 ; C6.1@39.975,52.025 40.325,51.675 U2.1@40.325,50.425 ; 41.886,60.111 cw(c42.5,59.498) v1@42.5,60.366
  Top Layer w0.508: v1@99,44.597 99,45.025 ccw(c99.485,45.025) v1@99.188,44.642
  Top Layer w0.762: D2.1@4.15,7.85 14.675,18.375 BEEP1.1@19.45,18.375 ; BEEP1.1@18.659,17.584 ccw(c16.748,15.673) 16.748,18.375 ccw(c16.748,21.077) BEEP1.1@18.659,19.166 ; C46.2@33.725,32.875 33.725,31.425 33.725,31 35.375,29.35 v1(35.65,29.35) ; 35.362,29.363 ccw(c35.65,29.652) v1@35.65,29.244 ; C6.1@39.975,52.025 40.675,52.025 40.817,52.167 40.817,52.358 ; v1(40.825,49.125) 42.1,49.125 ; v1@42.1,47.975 42.1,49.125 ; v1@42.225,47.85 43.775,47.85 44.45,48.525 ; 43.225,64.55 43.45,64.55 ; 43.246,64.55 ccw(c43.246,65.404) v1@43.85,64.8 ; v1(43.775,64.875) 43.45,64.55 ; v1@43.873,64.835 cw(c43.45,65.007) 43.45,64.55 ; C29.1@44,54.3 44,55.225 42.592,56.633 ; 44.285,48.36 ccw(c43.569,49.075) C20.1@44.581,49.075 ; C20.1@44.45,49.075 44.45,48.525 ; C30.1@44.45,60.325 44.45,61.225 44.525,61.3 44.35,61.475 43.25,61.475 42.592,60.817 42.592,56.633 ; R14.1@44.525,39.8 44.525,39.75 v1(45.15,39.125) 49.25,35.025 55.45,35.025 v1(56,35.575) ; C20.1@44.571,49.124 cw(c44.059,48.916) 44.45,48.525 ; v1(49.4,69.65) 49.4,68.675 50.325,67.75 ; 50.107,67.968 ccw(c50.95,68.812) C15.1@50.95,67.619 ; C15.1@51.006,67.632 cw(c50.75,68.175) 50.325,67.75 ; SP1.5@52.1,74.436 53.838,74.436 C12.1@54.35,73.925 54.475,73.8 C25.1@54.475,71.925 54.475,71 ; 52.828,74.436 cw(c52.828,72.403) 54.266,73.841 cw(c53.761,73.336) 54.475,73.336 ; C19.1@53.367,67.75 C26.1@52.158,67.75 51.45,67.75 C15.1@50.95,67.75 50.325,67.75 ; v1@54.071,70.821 cw(c54.475,70.455) 54.475,71 ; v1@54.075,70.825 cw(c54.498,70.402) 54.498,71 ; v1(54.15,70.75) 54.475,71.075 ; v1@54.225,70.675 ccw(c53.621,71.279) 54.475,71.279 ; C52.1@55.825,30.7 v1(56.75,30.7) ; v1@56.75,30.775 U11.4@57.8,30.775 ; C17.1@60.45,66.6 Y1.4@58.725,68.325 58.725,69.225 ; C42.2@61.918,70.307 ccw(c61.598,70.627) C42.2@62.05,70.627 ; D4.1@62.05,74.05 v1(62.05,71.5) 62.05,70.625 C42.2@61.825,70.4 61.825,69.65 61.4,69.225 58.725,69.225 ; R11.2@64.2,30.775 64.225,30.75 v1(64.225,29.725) R10.2@64.225,28.625 ; U12.5@71.475,33.75 71.575,33.85 C54.1@73.4,33.85 72.854,33.304 v1(72.854,32.927) ; v1@72.748,32.927 cw(c73.402,32.927) 72.939,33.389 ; v1@74.025,53.622 74.872,53.622 C28.1@75.4,54.15 ; v1(74.25,48.4) 74.9,49.05 ; 74.425,60.2 75.075,60.2 C22.1@75.4,60.525 75.4,59.875 ; 74.932,60.2 ccw(c74.932,60.993) C22.1@75.493,60.432 ; C18.1@75.27,59.48 cw(c75.725,59.55) 75.4,59.875 ; C18.1@75.4,59.5 75.35,59.55 75.35,59.825 75.4,59.875 ; D3.1@131.982,7.85 132.032,7.9 v1(133.1,7.9) ; 40.817,52.358 40.817,54.442 42.592,56.217 42.592,56.633 ; 40.817,52.358 42.1,51.075 42.1,49.125 ; 54.475,71 57.75,71 Y1.1@58.725,70.025 58.725,69.225 ; R3.1@42.394,57.025 ccw(c42.862,57.025) 42.531,56.694 cw(c42.862,57.025) R3.1@42.394,57.025 ; v1@42.394,60.45 cw(c42.802,60.45) 42.513,60.738 ccw(c42.802,60.45) v1@42.394,60.45 ; R9.2@42.95,64.294 ccw(c42.95,64.883) 43.367,64.467 cw(c42.95,64.883) R9.2@42.95,64.294
  Mid-Layer 1 w0.254: v1@61.77,37.57 cw(c61.518,37.318) 61.875,37.318 cw(c62.232,37.318) v1@61.98,37.57 ; 61.875,36.175 v1(61.875,37.675) ; 61.875,36.492 ccw(c62.568,36.492) v1@62.078,36.002 ; 61.875,37.105 ccw(c63.182,37.105) v1@62.258,36.181 ; v1(67.95,37.65) 69.85,37.65 71.402,36.098 v1(71.403,35.902) v1(71.403,35.902) ; v1@68.055,37.545 cw(c68.307,37.293) 68.307,37.65 cw(c68.307,38.007) v1@68.055,37.755 ; 71.013,36.487 cw(c70.428,35.902) v1@71.255,35.902
  Mid-Layer 1 w0.381: v1(18.725,51.25) 23.475,51.25 v1(23.95,51.725)
  Mid-Layer 1 w0.762: BEEP1.1@19.45,18.375 19.45,19.125 23.25,22.925 29.225,22.925 v1(35.65,29.35) 50.7,29.35 56,34.65 v1(56,35.575) ; BEEP1.1@19.45,19.494 ccw(c19.45,20.385) 20.08,19.755 ; BEEP1.1@19.807,18.375 cw(c22.48,18.375) 20.59,20.265 ; BEEP1.1@20.569,18.375 cw(c25.081,18.375) 21.891,21.566 ; v1@29.953,73.733 ccw(c30.358,73.909) 30.358,73.467 ; v1@29.975,73.7 ccw(c30.538,74.263) 30.538,73.467 ; v1(30.05,73.775) 30.358,73.467 ; v1(38.7,48.8) 40.5,48.8 ; 40.296,48.8 ccw(c40.296,49.654) v1@40.9,49.05 ; v1(40.825,49.125) 40.5,48.8 ; v1@40.923,49.085 cw(c40.5,49.257) 40.5,48.8 ; v1(42.5,60.45) 42.5,62.175 43.775,63.45 v1(43.775,64.875) ; v1(54.15,70.75) 53.575,70.175 v1(49.4,69.65) v1(43.825,69.65) 42.175,69.65 38.358,73.467 30.358,73.467 ; v1(56.1,37.325) 56,37.225 v1(56,35.575) ; v1(62.153,36.077) 61.651,35.575 57.55,35.575 ; 63.836,29.992 cw(c63.836,29.336) v1@64.3,29.8 ; v1(64.225,29.725) 63.958,29.992 61.576,29.992 60.868,30.7 v1(56.75,30.7) 57.55,31.5 57.55,35.575 ; v1(112.65,51.575) 113.4,50.825 123.9,50.825 125.375,49.35 125.375,44.85 v1(125.15,44.625) ; v1@125.225,44.55 ccw(c124.863,44.912) 125.375,44.912 ; v1(56,35.575) 57.55,35.575
  Mid-Layer 2 w0.381: v1(23.95,51.725) 23.95,50.375 25.168,49.157 29.857,49.157 v1(29.925,49.225) ; 29.558,49.157 ccw(c29.558,49.592) v1@29.865,49.285
  Mid-Layer 2 w0.762: v1(33.725,48.525) 34.6,47.65 36.3,47.65 37.45,48.8 v1(38.7,48.8) ; v1(42.125,47.925) 42.125,45.35 44.3,43.175 ; v1(43.775,64.875) v1(43.825,69.65) ; v1(45.15,39.125) 44.3,39.975 44.3,43.175 ; v1(49.15,44.6) 47.725,43.175 44.3,43.175 ; v1(62.05,71.5) 70.375,71.5 73.05,68.825 73.05,60.5 ; 73.071,60.479 ccw(c74,61.407) v1@74,60.094 ; v1(74,60.2) 73.35,60.2 ; v1@74.053,60.108 cw(c73.761,60.611) 73.35,60.2 ; v1(74.25,48.4) 74.375,48.525 74.375,49.775 ; 94.832,48.975 ccw(c94.832,50.768) v1@96.1,49.5 ; v1@95.95,49.5 ccw(c97.218,50.768) 97.218,48.975 ; v1(96.025,49.575) 96.025,49.025 ; v1@96.119,49.623 cw(c95.661,49.389) 96.025,49.025 ; v1@96.126,49.608 cw(c95.536,49.414) 95.975,48.975 ; 107.807,51.375 cw(c107.807,50.607) v1@108.35,51.15 ; v1(108.275,51.075) 107.975,51.375 ; v1@108.372,51.118 ccw(c107.975,50.94) 107.975,51.375 ; 73.05,60.5 73.05,54.593 v1(73.871,53.771) 74.375,53.268 74.375,49.775 ; 73.05,60.5 73.35,60.2 ; 74.375,49.775 79.6,49.775 82.725,52.9 87.75,52.9 91.675,48.975 95.975,48.975 ; 95.975,48.975 99.275,48.975 101.675,51.375 107.975,51.375 ; 95.975,48.975 96.025,49.025
  Bottom Layer w0.762: v1(62.153,36.077) 64.723,36.077 66.025,34.775 70.277,34.775 v1(71.403,35.902) 71.403,34.697 72.9,33.2 72.9,32.973 v1(72.854,32.927) ; 72.808,33.292 cw(c72.443,32.927) v1@72.96,32.927 ; v1(74.25,48.4) 73.675,47.825 73.675,44.825 74.758,43.742 74.758,43.042 75.6,42.2 v1(75.625,42.2) ; v1(96.025,49.575) 96.025,47.7 v1@98.98,44.745 ; v1(108.275,51.075) 108.275,51.275 109.325,52.325 111.9,52.325 v1(112.65,51.575) ; v1(125.15,44.625) 125.025,44.5 125.025,10.375 126.325,9.075 132,9.075 133.1,7.975 v1(133.1,7.9)
  other v1: 4.65,7.25 4.6,8.325 99.175,44.625
5V: C33.1 C34.1 C37.1 C38.1 C39.1 C41.2 C43.1 C47.1 C53.1 L1.1 L2.1 P3.49 P3.50 S1.2 SP1.1 SP1.3 U3.5 U6.4 U6.5 U9.7 | length 186.3
  Top Layer w0.762: S1.2@8.989,73.739 cw(c8.359,73.109) 9.25,73.109 cw(c10.141,73.109) S1.2@9.511,73.739 ; 9.25,70.51 ccw(c10.135,70.51) C38.1@9.509,69.884 ; S1.2@9.25,74 9.25,69.975 C38.1@9.425,69.8 9.95,70.325 C39.1@11.25,70.325 ; C38.1@9.509,69.716 cw(c10.98,68.245) 10.98,70.325 ; U9.7@36.025,71.745 37.83,71.745 v1(38,71.575) 38.225,71.35 C43.1@38.225,68.175 ; C47.1@36.225,67.725 37.775,67.725 C43.1@38.225,68.175 ; 37.139,67.725 ccw(c37.139,69.261) C43.1@38.225,68.175 ; C41.2@44.1,74.548 44.248,74.4 v1(46.6,74.4) ; 46.067,74.4 cw(c46.067,73.766) C37.1@46.516,74.214 ; C37.1@46.719,74.298 ccw(c48.994,74.298) 47.385,72.69 ; 47.54,72.535 ccw(c48.275,73.27) v1@48.275,72.23 ; v1@48.322,72.242 cw(c48.096,72.694) 47.739,72.336 ; SP1.3@49.3,72.336 v1(48.275,72.336) 47.739,72.336 ; SP1.1@49.3,74.436 49.162,74.298 C37.1@46.6,74.298 46.6,73.475 47.739,72.336 ; C33.1@83.984,59.116 cw(c85.575,57.525) 85.575,59.775 ; 88,61.551 cw(c89.972,61.551) L2.1@88.578,62.945 ; L2.1@88.525,63.125 88,62.6 U6.4@88,60.875 U6.5@88,59.825 86.2,59.825 C53.1@86.15,59.775 84.475,59.775 C33.1@83.9,59.2 83.9,56.975 89.775,51.1 v1(94,51.1) 95.625,51.1 96.225,50.5 ; 95.292,51.1 cw(c95.292,50.442) U3.5@95.757,50.907 ; L1.1@102.5,56.4 109.625,56.4 116.025,50 119.4,50 ; L1.1@103.661,56.139 cw(c104.291,55.509) 104.291,56.4 cw(c104.291,57.291) L1.1@103.661,56.661 ; v1@38.075,71.65 cw(c37.713,71.288) 38.225,71.288 ccw(c37.713,71.288) v1@38.075,71.65
  Mid-Layer 1 w0.762: S1.2@8.989,73.739 cw(c8.359,73.109) 9.25,73.109 cw(c10.141,73.109) S1.2@9.511,73.739 ; S1.2@9.25,74 9.25,69.4 11.975,66.675 33.1,66.675 v1(38,71.575)
  Mid-Layer 2 w0.762: v1(38,71.575) 41.2,71.575 43.7,74.075 46.325,74.075 ; 46.071,74.075 ccw(c46.071,74.929) v1@46.675,74.325 ; v1(46.6,74.4) 46.625,74.4 46.65,74.425 46.65,74.4 46.325,74.075 ; v1@46.703,74.376 cw(c46.325,74.463) 46.325,74.075
  Bottom Layer w0.762: v1(48.275,72.336) 79.564,72.336 88.4,63.5 v1(88.4,63.25) ; v1(94,51.1) 99.275,56.375 v1(102.35,56.375)
BOOT1: R12.2 R52.1 U5.58 | length 51.7
  Top Layer w0.254: v1@28.495,28.67 cw(c28.243,28.418) 28.6,28.418 cw(c28.957,28.418) v1@28.705,28.67 ; R52.1@28.6,27.916 ccw(c28.967,27.916) R52.1@28.707,27.657 ; v1@28.6,28.529 ccw(c29.58,28.529) R52.1@28.887,27.837 ; v1(28.6,28.775) 28.6,27.95 R52.1@28.8,27.75 ; 28.671,28.265 cw(c29.226,28.414) v1@28.728,28.701 ; R12.2@43.775,56.627 cw(c43.775,56.33) 43.985,56.54 cw(c44.195,56.75) R12.2@43.898,56.75 ; R12.2@43.775,56.75 v1(44.475,56.05) U5.58@46.8,56.05 ; v1@44.327,56.05 ccw(c43.97,56.05) 44.222,56.303 ccw(c44.475,56.555) v1@44.475,56.198 ; v1@44.58,55.945 cw(c44.832,55.693) 44.832,56.05 cw(c44.832,56.407) v1@44.58,56.155
  Mid-Layer 1 w0.254: v1@28.495,28.67 ccw(c28.243,28.418) 28.243,28.775 ccw(c28.243,29.132) v1@28.495,28.88 ; v1(28.6,28.775) 26.775,28.775 25.4,30.15 25.4,41.2 26.6,42.4 31.125,42.4 32.6,43.875 34.95,43.875 37.975,46.9 37.975,51.05 42.975,56.05 v1(44.475,56.05) ; v1@44.37,55.945 ccw(c44.118,55.693) 44.118,56.05 ccw(c44.118,56.407) v1@44.37,56.155
FMC-A0: U2.23 U5.16 | length 55.4
  Top Layer w0.127: U2.23@22.629,50.822 ccw(c22.395,51.055) 22.725,51.055 ccw(c23.055,51.055) U2.23@22.822,50.822 ; U2.23@22.725,50.425 22.725,51.6 ; v1@22.839,51.909 cw(c22.447,51.878) 22.725,51.6 ; v1@23.034,51.714 ccw(c23.003,51.322) 22.725,51.6 ; v1(23.05,51.925) 22.725,51.6 ; v1@62.875,61.3 ccw(c62.695,61.48) 62.95,61.48 ; U5.16@62.907,64.182 cw(c62.802,64.077) 62.95,64.077 cw(c63.098,64.077) U5.16@62.993,64.182 ; 62.95,61.535 ccw(c63.41,61.535) v1@63.085,61.21 ; 62.95,61.842 ccw(c63.717,61.842) v1@63.175,61.3 ; U5.16@62.95,64.7 62.95,61.225 v1(63.025,61.15)
  Bottom Layer w0.127: v1@22.979,52.124 ccw(c22.943,52.225) 23.05,52.225 ; v1@23.007,51.925 cw(c23.629,51.925) 23.19,52.365 ; v1(23.05,51.925) 23.05,52.225 ; v1@23.121,52.124 cw(c23.157,52.225) 23.05,52.225 ; v1@23.134,51.925 cw(c24.063,51.925) 23.406,52.581 ; v1@23.261,51.925 cw(c24.496,51.925) 23.623,52.798 ; v1@62.875,61 cw(c62.514,60.639) 63.025,60.639 cw(c63.536,60.639) v1@63.175,61 ; v1(63.025,61.15) 63.025,60.6 61.237,58.812 44.936,58.812 39.904,53.78 24.605,53.78 23.05,52.225
FMC-A1: U2.24 U5.17 | length 52.9
  Top Layer w0.127: U2.24@21.829,50.822 ccw(c21.595,51.055) 21.925,51.055 ccw(c22.255,51.055) U2.24@22.022,50.822 ; U2.24@21.925,50.425 21.925,51.95 v1(22.575,52.6) ; v1@22.364,52.6 cw(c21.853,52.6) 22.214,52.239 cw(c22.575,51.878) v1@22.575,52.389 ; v1@61.976,60.675 ccw(c61.675,60.975) 62.1,60.975 ; v1(62.125,60.525) 62.1,60.55 62.1,60.975 ; v1@62.245,60.699 cw(c62.435,60.975) 62.1,60.975 ; U5.17@62.407,64.182 cw(c62.302,64.077) 62.45,64.077 cw(c62.598,64.077) U5.17@62.494,64.182 ; U5.17@62.45,64.7 62.45,61.325 62.1,60.975
  Bottom Layer w0.127: v1(22.575,52.6) 24.009,54.034 39.798,54.034 44.83,59.066 61.132,59.066 62.1,60.034 62.1,60.5 v1(62.125,60.525) ; v1@22.575,52.811 ccw(c22.575,53.322) 22.936,52.961 ccw(c23.297,52.6) v1@22.786,52.6
FMC-A2: U2.25 U5.18 | length 56.1
  Top Layer w0.127: U2.25@21.029,50.822 ccw(c20.795,51.055) 21.125,51.055 ccw(c21.455,51.055) U2.25@21.222,50.822 ; U2.25@21.125,50.425 21.125,52.1 v1(21.6,52.575) ; v1@21.389,52.575 cw(c20.878,52.575) 21.239,52.214 cw(c21.6,51.853) v1@21.6,52.364 ; v1@61.6,61.775 ccw(c60.757,62.618) 61.95,62.618 ; v1@61.69,61.685 ccw(c61.063,62.312) 61.95,62.312 ; v1(61.75,61.625) 61.75,61.65 61.95,61.85 ; v1@61.78,61.595 ccw(c61.37,62.005) 61.95,62.005 ; v1@61.825,61.823 ccw(c61.866,61.934) 61.95,61.85 ; U5.18@61.907,64.182 cw(c61.802,64.077) 61.95,64.077 cw(c62.099,64.076) U5.18@61.994,64.182 ; v1@61.934,61.73 cw(c62.021,61.779) 61.95,61.85 ; U5.18@61.95,64.7 61.95,61.85
  Bottom Layer w0.127: v1(21.6,52.575) 21.6,52.725 23.163,54.288 39.693,54.288 44.725,59.32 60.82,59.32 61.55,60.05 61.55,61.175 ; v1@21.6,52.786 ccw(c21.6,52.935) 21.705,52.83 ; v1@21.684,52.575 cw(c22.251,52.575) 21.85,52.975 ; v1@21.811,52.575 cw(c22.684,52.575) 22.067,53.192 ; v1@61.578,61.503 cw(c61.37,61.355) 61.55,61.175 ; 61.656,61.281 ccw(c61.494,61.443) v1@61.681,61.576 ; v1(61.75,61.625) 61.75,61.375 61.55,61.175
FMC-A3: U2.26 U5.19 | length 55.7
  Top Layer w0.127: U2.26@20.229,50.822 ccw(c19.995,51.055) 20.325,51.055 ccw(c20.655,51.055) U2.26@20.422,50.822 ; U2.26@20.325,50.425 20.325,51.8 v1@20.425,51.9 ; 20.325,50.932 cw(c21.518,50.932) v1@20.675,51.775 ; 20.325,51.238 cw(c21.212,51.238) v1@20.585,51.865 ; 20.325,51.545 cw(c20.905,51.545) v1@20.495,51.955 ; v1@60.825,61.225 ccw(c60.464,61.586) 60.975,61.586 ccw(c61.486,61.586) v1@61.125,61.225 ; v1(60.975,61.075) 60.975,61.725 61.45,62.2 U5.19@61.45,64.7 ; U5.19@61.407,64.182 cw(c61.302,64.077) 61.45,64.077 cw(c61.598,64.077) U5.19@61.494,64.182
  Bottom Layer w0.127: v1@20.375,52.075 ccw(c20.256,52.194) 20.425,52.194 ; v1@20.425,51.9 20.425,52.275 ; v1@20.55,52.135 cw(c20.566,52.275) 20.425,52.275 ; v1@60.825,60.925 cw(c60.283,60.383) 61.05,60.383 ; v1@60.915,61.015 cw(c60.59,60.69) 61.05,60.69 ; v1(60.975,61.075) 61.05,61 61.05,60.075 60.549,59.574 44.62,59.574 39.588,54.542 22.692,54.542 20.425,52.275 ; 61.05,60.745 cw(c61.305,60.745) v1@61.125,60.925
  other v1: 20.525,51.925
FMC-A4: U2.29 U5.20 | length 67
  Top Layer w0.127: v1@20,48.325 cw(c19.217,47.542) 20.325,47.542 ; v1@20.09,48.415 cw(c19.523,47.848) 20.325,47.848 ; v1(20.15,48.475) 20.325,48.3 U2.29@20.325,38.825 ; v1@20.18,48.505 cw(c19.83,48.155) 20.325,48.155 ; U2.29@20.229,39.222 ccw(c19.995,39.455) 20.325,39.455 ccw(c20.655,39.455) U2.29@20.422,39.222 ; v1@59.975,60.55 ccw(c59.614,60.911) 60.125,60.911 ccw(c60.636,60.911) v1@60.275,60.55 ; v1(60.125,60.4) 60.125,61.4 60.95,62.225 U5.20@60.95,64.7 ; U5.20@60.907,64.182 cw(c60.802,64.077) 60.95,64.077 cw(c61.098,64.077) U5.20@60.994,64.182
  Bottom Layer w0.127: v1@19.939,48.475 ccw(c19.428,48.475) 19.789,48.836 ccw(c20.15,49.197) v1@20.15,48.686 ; v1(20.15,48.475) 19.775,48.85 19.775,52.175 22.396,54.796 39.483,54.796 44.515,59.828 59.553,59.828 v1(60.125,60.4) ; v1@59.914,60.4 cw(c59.403,60.4) 59.764,60.039 cw(c60.125,59.678) v1@60.125,60.189
FMC-A5: U2.30 U5.21 | length 66.7
  Top Layer w0.127: v1@20.975,47.1 cw(c20.614,46.739) 21.125,46.739 ; U2.30@21.029,39.222 ccw(c20.795,39.455) 21.125,39.455 ccw(c21.455,39.455) U2.30@21.222,39.222 ; U2.30@21.125,38.825 v1(21.125,47.25) ; 21.125,46.739 cw(c21.636,46.739) v1@21.275,47.1 ; v1(59.425,61.1) 59.425,61.175 60.45,62.2 U5.21@60.45,64.7 ; v1@59.425,61.311 ccw(c59.425,61.641) 59.658,61.408 ; v1@59.509,61.1 cw(c59.895,61.1) 59.622,61.372 ; v1@59.636,61.1 cw(c60.328,61.1) 59.839,61.589 ; U5.21@60.407,64.182 cw(c60.302,64.077) 60.45,64.077 cw(c60.598,64.077) U5.21@60.494,64.182
  Bottom Layer w0.127: v1@20.975,47.1 ccw(c20.614,46.739) 20.614,47.25 ccw(c20.614,47.761) v1@20.975,47.4 ; v1(21.125,47.25) 20.45,47.25 19.346,48.354 19.346,52.396 22.013,55.063 39.391,55.063 44.41,60.082 58.407,60.082 v1(59.425,61.1) ; v1@59.214,61.1 cw(c58.703,61.1) 59.064,60.739 cw(c59.425,60.378) v1@59.425,60.889
FMC-A6: U2.31 U5.60 | length 39.3
  Top Layer w0.127: U2.31@21.829,39.222 ccw(c21.595,39.455) 21.925,39.455 ccw(c22.255,39.455) U2.31@22.022,39.222 ; U2.31@21.925,38.825 21.925,46.45 v3(23.5,48.025) ; v3@23.339,48.025 cw(c22.949,48.025) 23.224,47.749 cw(c23.5,47.474) v3@23.5,47.864 ; v3(45,55.025) 45.025,55.05 U5.60@46.8,55.05 ; v3@45.114,54.911 cw(c45.45,54.575) 45.45,55.05 ; v3@45.114,55.139 ccw(c45.329,55.354) 45.329,55.05 ; U5.60@46.282,55.007 ccw(c46.177,54.902) 46.177,55.05 ccw(c46.177,55.198) U5.60@46.282,55.094
  Bottom Layer w0.127: v3(23.5,48.025) 26.159,48.025 30.191,52.057 41.282,52.057 44.2,54.975 44.95,54.975 v3(45,55.025) ; v3@23.614,47.911 cw(c23.89,47.635) 23.89,48.025 cw(c23.89,48.415) v3@23.614,48.139 ; 44.489,54.975 ccw(c44.489,55.536) v3@44.886,55.139 ; 44.731,54.975 cw(c44.731,54.756) v3@44.886,54.911
FMC-A7: U2.32 U5.63 | length 39
  Top Layer w0.127: U2.32@22.629,39.222 ccw(c22.395,39.455) 22.725,39.455 ccw(c23.055,39.455) U2.32@22.822,39.222 ; U2.32@22.725,38.825 22.725,46.575 23.25,47.1 v1(23.325,47.1) ; 22.836,46.686 cw(c23.325,46.197) v1@23.325,46.889 ; 23.017,46.867 ccw(c22.784,47.1) v1@23.114,47.1 ; 23.053,46.903 cw(c23.325,46.63) v1@23.325,47.016 ; v1(45.252,53.528) 46.778,53.528 U5.63@46.8,53.55 ; v1@45.402,53.378 cw(c45.763,53.017) 45.763,53.528 cw(c45.763,54.038) v1@45.402,53.677 ; 46.122,53.528 ccw(c46.122,53.753) U5.63@46.282,53.594
  Bottom Layer w0.127: v1(23.325,47.1) 23.997,47.1 24.472,47.575 26.068,47.575 30.296,51.803 41.428,51.803 43.175,53.55 45.179,53.55 45.252,53.477 v1(45.252,53.528) ; v1@23.475,46.95 cw(c23.836,46.589) 23.836,47.1 cw(c23.836,47.611) v1@23.475,47.25 ; 44.688,53.55 cw(c44.688,52.963) v1@45.103,53.378 ; 44.796,53.55 ccw(c44.796,53.984) v1@45.103,53.677
FMC-A8: U2.33 U5.64 | length 37.7
  Top Layer w0.127: v1@23.375,45.875 cw(c23.014,45.514) 23.525,45.514 cw(c24.036,45.514) v1@23.675,45.875 ; U2.33@23.429,39.222 ccw(c23.195,39.455) 23.525,39.455 ccw(c23.855,39.455) U2.33@23.622,39.222 ; U2.33@23.525,38.825 v1(23.525,46.025) ; v1(44.625,52.875) 44.65,52.85 45.3,52.85 45.5,53.05 U5.64@46.8,53.05 ; v1@44.775,52.725 cw(c45.075,52.425) 45.075,52.85 ; v1@44.775,53.025 ccw(c45.196,53.446) 45.196,52.85 ; U5.64@46.282,53.007 ccw(c46.177,52.902) 46.177,53.05 ccw(c46.177,53.198) U5.64@46.282,53.094
  Bottom Layer w0.127: v1(23.525,46.025) 23.625,46.025 24.7,47.1 25.953,47.1 30.402,51.549 41.674,51.549 42.975,52.85 44.6,52.85 v1(44.625,52.875) ; v1@23.525,46.109 ccw(c23.525,46.555) 23.84,46.24 ; v1@23.525,46.236 ccw(c23.525,46.989) 24.057,46.457 ; v1@23.736,46.025 cw(c24.006,46.025) 23.815,46.215 ; 44.054,52.85 ccw(c44.054,53.446) v1@44.475,53.025 ; 44.175,52.85 cw(c44.175,52.425) v1@44.475,52.725